# Altium PCB Stm32_Minimum_Board_V1.0.PcbDoc
Units mm, origin at the board's own origin, x right, y up, seen from the top; angles counter-clockwise.
Board outline 53.34 x 22.86 mm, 2 copper layers (Top Layer, Bottom Layer); 31 components, 51 nets, 163 pads, 1 vias.
Unrouted connection lines stored in the file: 103.
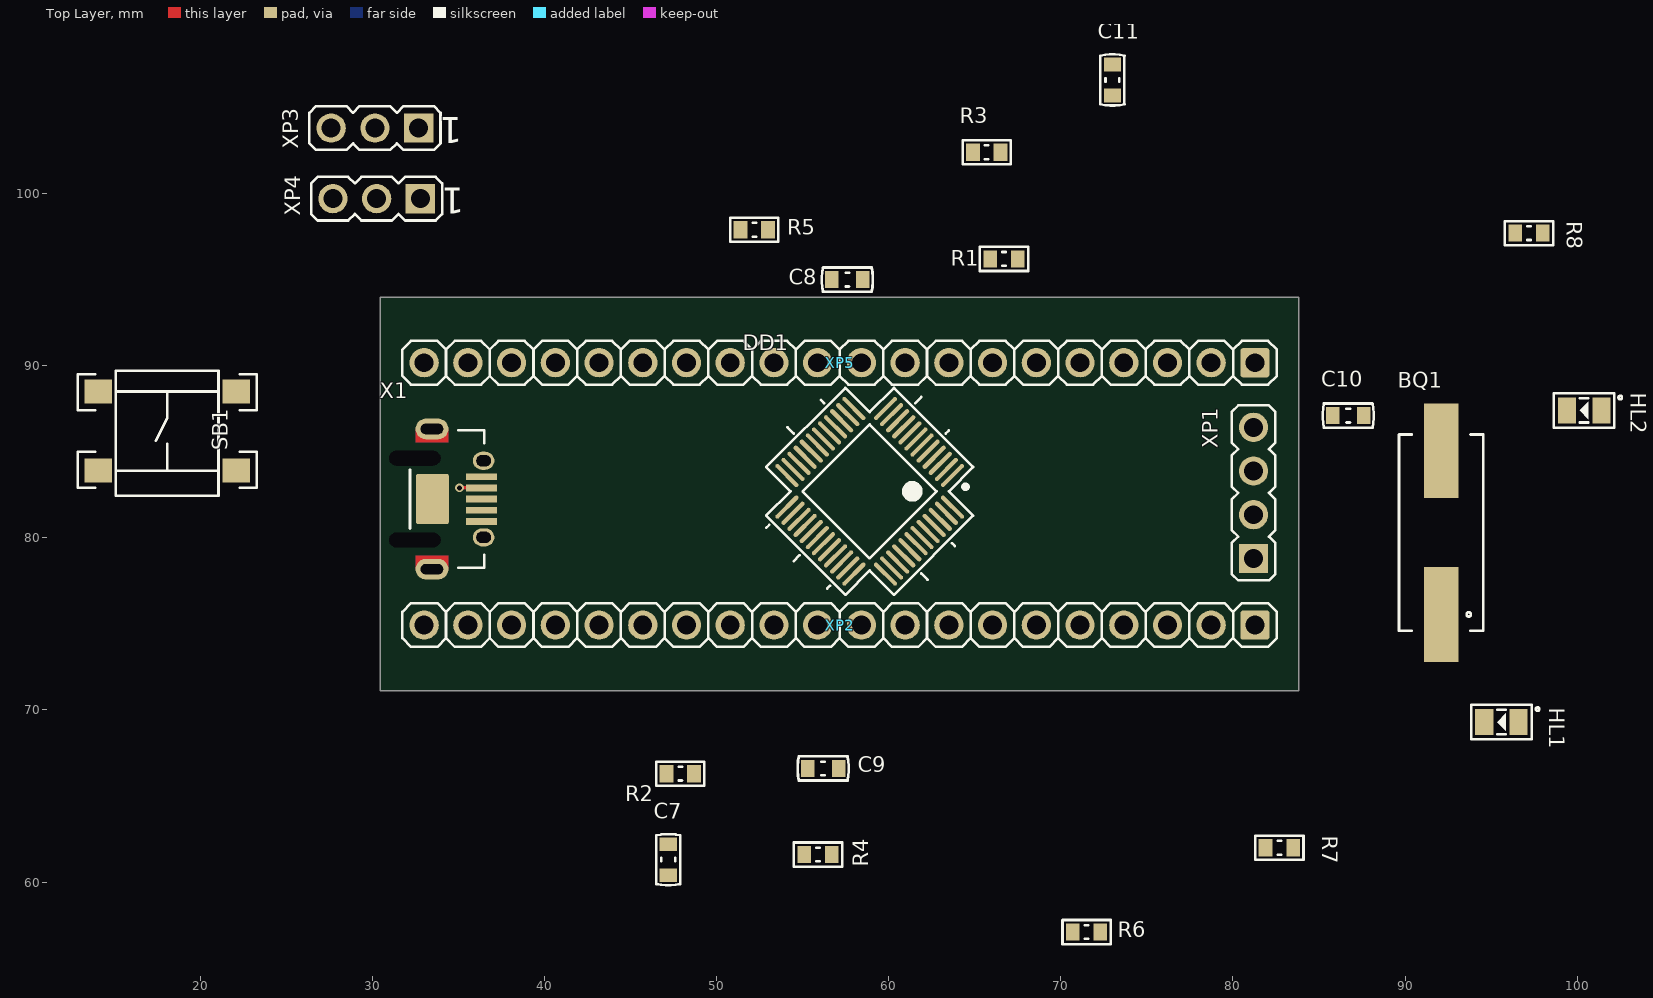
[diagram p0: Top Layer view]
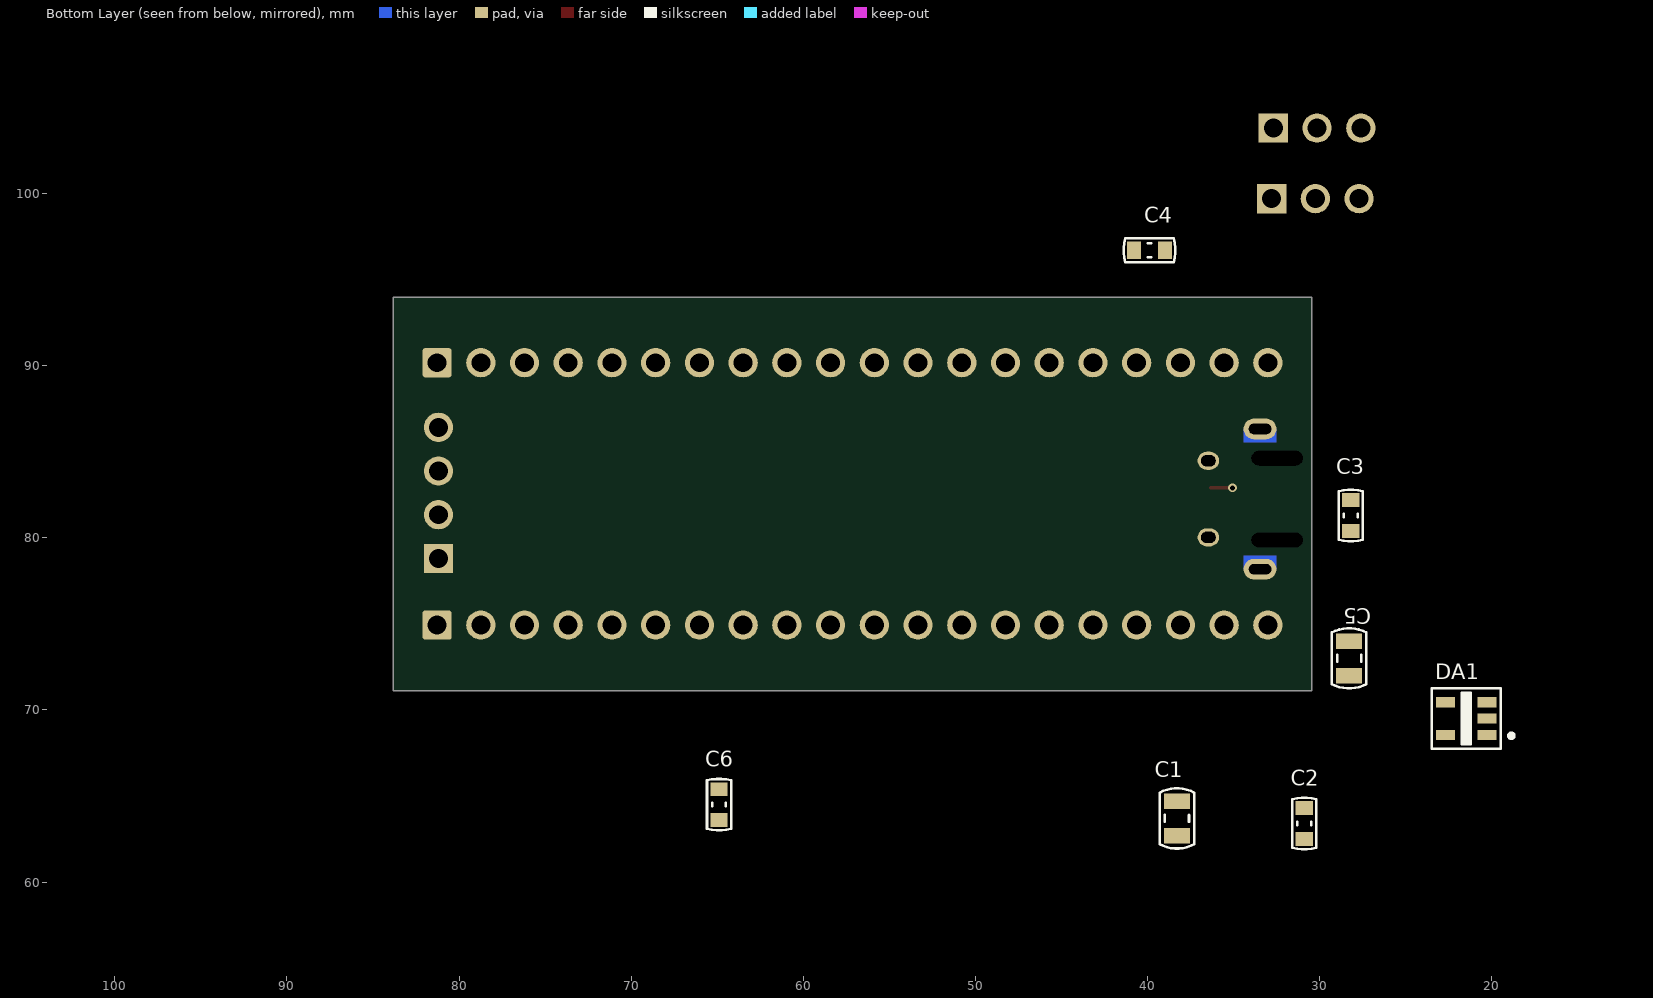
[diagram p1: Bottom Layer view, seen from below]

## Layer stack, top to bottom
Top Solder: solder mask 0.0102, Solder Resist, Dk 3.5
Top Layer: signal copper 0.0356
Dielectric 1: dielectric 0.32, FR-4, Dk 4.8
Bottom Layer: signal copper 0.0356
Bottom Solder: solder mask 0.0102, Solder Resist, Dk 3.5

## Board outline
30.48,71.12 83.82,71.12 83.82,93.98 30.48,93.98

## Design rules (kind name [scope] priority, off if disabled: settings)
BoardOutlineClearance [All] p1: gap=0.4 ignorepadtopadclearanceinfootprint=FALSE
Clearance [All] p1: gap=0.2 ignorepadtopadclearanceinfootprint=FALSE except(0.125: Arc-Track Track-Track; 0.25: Arc-Arc Arc-Via Arc-Hole Track-Via Track-Hole SMDPad-Via SMDPad-Hole THPad-Via THPad-Hole Via-Via Via-Hole Fill-Hole Poly-Hole Region-Hole Text-Hole)
DiffPairsRouting [All] p1: maxlimit=0.2 minlimit=0.125 mostfreqgap=0.2 toplayer_minwidth=0.125 toplayer_maxwidth=0.3 toplayer_prefwidth=0.2 bottomlayer_minwidth=0.125 bottomlayer_maxwidth=0.3 bottomlayer_prefwidth=0.2 maxuncoupledlength=12.7
HoleSize [All] p1: absolutevalues=TRUE maxlimit=3.5 minlimit=0.5 maxpercent=80.000 minpercent=20.000
HoleToHoleClearance [All] p1: gap=0.25 allowstackedmicrovias=TRUE
MinimumAnnularRing [All] p1: minimumring=0.15
MinimumSolderMaskSliver [All] p1: minsoldermaskwidth=0.15
PlaneClearance [All] p1: clearance=0.5
PlaneConnect [All] p1: planeconnectstyle=Direct reliefexpansion=0.508 reliefentries=4 reliefconductorwidth=0.254 reliefairgap=0.254
PolygonConnect [All] p1: connectstyle=Relief reliefconductorwidth=0.25 reliefentries=4 polygonreliefangle="90 Angle" airgapwidth=0.25
RoutingCorners [All] p1: cornerstyle=45-Degree minsetback=2.5 maxsetback=2.5
RoutingVias [All] p1: holewidth=0.3 width=0.5 viastyle="Through Hole" minholewidth=0.3 minwidth=0.5 maxholewidth=1 maxwidth=1.2
SMDEntry [All] p1: side=TRUE corner=TRUE anyangle=FALSE
SMDToCorner [All] p1: distance=78740
SMDToPlane [All] p1: distance=196850
SilkToSilkClearance [All] p1: silktosilkclearance=0.25
SilkToSolderMaskClearance [IsPad] p1: minsilkscreentomaskgap=0.25 clearancetoexposedcopper=TRUE
SolderMaskExpansion [All] p1: expansion=0.05 soldermaskfromhole=TRUE
Width [All] p1: maxlimit=1 minlimit=0.125 preferedwidth=0.2
21 further rules are at their usual default settings.

## Classes and differential pairs
component class Stm32_Minimum_Board_V1.0: BQ1 C1 C2 C3 C4 C5 C6 C7 C8 C9 C11 DA1 DD1 HL1 HL2 R1 R2 R3 R4 R5 R6 R7 SB1 X1 XP1 XP2 XP3 XP4 XP5

## Components (designator, comment, footprint, x,y, rotation, side; value= is the part's Value field where it differs from the comment)
BQ1 "HC-49SMD" HC49-SMD 92.1,80.3 r90 top
C1 "CC0805-X7R-10 мкФ-20%-25В" CC0805 38.3,63.7 r90 bottom value="10 мкФ"
C2 "CC0603-X5R-0.1 мкФ-20%-10В" CC0603 30.9,63.4 r90 bottom value="0.1 мкФ"
C3 "CC0603-X5R-0.1 мкФ-20%-10В" CC0603 28.2,81.3 r90 bottom value="0.1 мкФ"
C4 "CC0603-X5R-0.1 мкФ-20%-10В" CC0603 39.9,96.7 r0 bottom value="0.1 мкФ"
C5 "CC0805-X7R-10 мкФ-20%-25В" CC0805 28.3,73 r90 bottom value="10 мкФ"
C6 "CC0603-X5R-0.1 мкФ-20%-10В" CC0603 64.9,64.5 r90 bottom value="0.1 мкФ"
C7 "CC0603-X5R-0.1 мкФ-20%-10В" CC0603 47.2,61.3 r90 top value="0.1 мкФ"
C8 "CC0603-X5R-0.1 мкФ-20%-10В" CC0603 57.6,95 r0 top value="0.1 мкФ"
C9 "CC0603-X5R-0.1 мкФ-20%-10В" CC0603 56.2,66.6 r180 top value="0.1 мкФ"
C10 "CC0603-X7R-22 пФ-20%-25В" CC0603 86.7,87.1 r0 top value="22 пФ"
C11 "CC0603-X7R-22 пФ-20%-25В" CC0603 73,106.6 r90 top value="22 пФ"
DA1 "TPS76133DBV" TSOP-5 21.5,69.5 r0 bottom
DD1 "STM32F103C8T7" LQFP50P700x700-48 58.9,82.7 r225 top
HL1 "KP-2012EC" KP-2012-RED 95.6,69.3 r180 top
HL2 "KP-2012MBC" KP-2012-BL 100.4,87.4 r180 top
R1 "CR0603-10 кОм-±5%" CR0603 66.7,96.2 r0 top value="10 кОм"
R2 "CR0603-22 Ом-±5%" CR0603 47.9,66.3 r0 top value="22 Ом"
R3 "CR0603-22 Ом-±5%" CR0603 65.7,102.4 r0 top value="22 Ом"
R4 "CR0603-10 кОм-±5%" CR0603 55.9,61.6 r180 top value="10 кОм"
R5 "CR0603-100 кОм-±5%" CR0603 52.2,97.9 r180 top value="100 кОм"
R6 "CR0603-100 кОм-±5%" CR0603 71.5,57.1 r0 top value="100 кОм"
R7 "CR0603-510 Ом-±5%" CR0603 82.7,62 r0 top value="510 Ом"
R8 "CR0603-510 Ом-±5%" CR0603 97.2,97.7 r0 top value="510 Ом"
SB1 "B3FS-1000P" B3FS-10xx 18.1,86.2 r180 top
X1 "microUSB-AB (475900001 Molex)" "microUSB-AB PCB (475900001 Molex)" 33.5,82.25 r90 top
XP1 "PLS-4" PLS-4 81.2,78.8 r90 top
XP2 "PLS-20" PLS-20 81.28,74.93 r180 top
XP3 "PLS-3" PLS-3 32.7,103.8 r180 top
XP4 "PLS-3" PLS-3 32.8,99.7 r180 top
XP5 "PLS-20" PLS-20 81.28,90.17 r180 top

## Footprints (in the part's own frame and the unit in brackets; to place one, negate y for a bottom-side part, rotate by r counter-clockwise, add the part's x,y. Pads: shape width x height; smd on the part's side, far side on the other; paste and mask are expansions set on the pad)
B3FS-10xx [mm]
  rect 1.6x1.4 smd: 1(4,-2.3) 2(-4,-2.3) 3(4,2.3) 4(-4,2.3)
  silkscreen extent -5.2,-3.5 5.2,3.75, body extent -6.3,-3.15 4,4.4, height 3.1
CC0603 [mm]
  rect 0.8x1 smd: 1(-0.9,0) 2(0.9,0)
  silkscreen extent -1.49,-0.7 1.49,0.7, body extent -0.81,-0.42 0.81,0.43, height 0.46
CC0805 [mm]
  rect 0.9x1.5 smd: 1(-1,0) 2(1,0)
  silkscreen extent -1.75,-1 1.75,1, body extent -1,-0.62 1,0.63, height 1.3
CR0603 [mm]
  rect 0.8x1 smd: 1(-0.8,0) 2(0.8,0)
  silkscreen extent -1.4,-0.7 1.4,0.7, body extent -0.81,-0.42 0.81,0.43, height 0.46
HC49-SMD [mm] "Quartz Crystal, SM; Body 13.4 (inc. leads) x 4.9 mm (LxW max)"
  rect 5.5x2 smd: 1(-4.75,0) 2(4.75,0)
  silkscreen extent -5.7,-2.45 5.7,2.45, body extent -7.5,-2.25 7.5,2.25, height 5.1
KP-2012-BL [mm] "Голубой светодиод 0805"
  rect 1.05x1.5 smd: 1(-1,0) 2(1,0)
  silkscreen extent -2.2,-1 1.75,1, body extent -1,-0.62 1,0.63, height 1.1
KP-2012-RED [mm] "Светодиод красный 0805"
  rect 1.05x1.5 smd: 1(-1,0) 2(1,0)
  silkscreen extent -2.2,-1 1.75,1, body extent -1,-0.62 1,0.63, height 1.1
LQFP50P700x700-48 [mm] "Thin QFP, 48-Leads, Body 7x7mm, Pitch 0.5mm, IPC Medium Density"
  oval 1.8x0.25 smd mask+0.05: 1(-4.05,2.75) 2(-4.05,2.25) 3(-4.05,1.75) 4(-4.05,1.25) 5(-4.05,0.75) 6(-4.05,0.25) 7(-4.05,-0.25) 8(-4.05,-0.75) 9(-4.05,-1.25) 10(-4.05,-1.75) 11(-4.05,-2.25) 12(-4.05,-2.75) 25(4.05,-2.75) 26(4.05,-2.25) 27(4.05,-1.75) 28(4.05,-1.25) 29(4.05,-0.75) 30(4.05,-0.25) 31(4.05,0.25) 32(4.05,0.75) 33(4.05,1.25) 34(4.05,1.75) 35(4.05,2.25) 36(4.05,2.75)
  oval 0.25x1.8 smd mask+0.05: 13(-2.75,-4.05) 14(-2.25,-4.05) 15(-1.75,-4.05) 16(-1.25,-4.05) 17(-0.75,-4.05) 18(-0.25,-4.05) 19(0.25,-4.05) 20(0.75,-4.05) 21(1.25,-4.05) 22(1.75,-4.05) 23(2.25,-4.05) 24(2.75,-4.05) 37(2.75,4.05) 38(2.25,4.05) 39(1.75,4.05) 40(1.25,4.05) 41(0.75,4.05) 42(0.25,4.05) 43(-0.25,4.05) 44(-0.75,4.05) 45(-1.25,4.05) 46(-1.75,4.05) 47(-2.25,4.05) 48(-2.75,4.05)
  silkscreen extent -6,-6 6,6, body extent -4.5,-4.5 4.5,4.5, height 1.2
"microUSB-AB PCB (475900001 Molex)" [mm]
  round 0 hole 0.85 slot 3 at 90 deg unplated: 0(-2.375,1.025) 0(2.375,1.025)
  rect 0.4x1.8 smd paste+0 mask+0: 1(-1.3,-2.85) 2(-0.65,-2.85) 3(0,-2.85) 4(0.65,-2.85) 5(1.3,-2.85)
  oval 1.2x1.9 hole 0.6 slot 1.3 at 90 deg: MH(-4.075,0.025) MH(4.075,0.025)
  oval 1.05x1.25 hole 0.65 slot 0.85 at 90 deg: MH(-2.225,-2.975) MH(2.225,-2.975)
  rrect10% 2.9x1.9 smd: MH(0,0)
  Multi-Layer region: -4.075,0.975 -3.3,0.975 -3.3,-0.925 -4.075,-0.925
  Multi-Layer region: 4.075,0.975 3.3,0.975 3.3,-0.925 4.075,-0.925
  silkscreen extent -4,-3 4,1.3, body extent -4.32,-3.11 4.32,2.79, height 2.71
PLS-3 [mm]
  rect 1.7x1.7 hole 1.1: 1(0,0)
  round 1.7 hole 1.1: 2(2.54,0) 3(5.08,0)
  silkscreen extent -1.27,-1.27 6.35,1.27
PLS-4 [mm]
  rect 1.7x1.7 hole 1.1: 1(0,0)
  round 1.7 hole 1.1: 2(2.54,0) 3(5.08,0) 4(7.62,0)
  silkscreen extent -1.27,-1.27 8.89,1.27, body extent -1.27,-1.27 8.89,1.27, height 8.8
PLS-20 [mm] "Штыри однорядные"
  rrect20% 1.7x1.7 hole 1.1: 1(0,0)
  round 1.7 hole 1.1: 2(2.54,0) 3(5.08,0) 4(7.62,0) 5(10.16,0) 6(12.7,0) 7(15.24,0) 8(17.78,0) 9(20.32,0) 10(22.86,0) 11(25.4,0) 12(27.94,0) 13(30.48,0) 14(33.02,0) 15(35.56,0) 16(38.1,0) 17(40.64,0) 18(43.18,0) 19(45.72,0) 20(48.26,0)
  silkscreen extent -1.27,-1.27 49.53,1.27, body extent -1.27,-1.27 49.53,1.27, height 8.54
TSOP-5 [mm] "(SOT23-5)"
  rect 1.1x0.6 smd: 1(-1.2,0.95) 2(-1.2,0) 3(-1.2,-0.95) 4(1.2,-0.95) 5(1.2,0.95)
  silkscreen extent -2.75,-1.75 2,1.75, body extent -1.3,-1.5 1.3,1.5, height 1.12

## Part data
BQ1: "Кварцевый резонатор"
C1 C5: library part CC0805-X7R-#-20%-25В, "Чип конденсатор керамический", Supplier Part Number 1=1458904, Supplier 1=Farnell, Компэл=CC0805KKX7R8BB225
C2 C3 C4 C6 C7 C8 C9: library part CC0603-X5R-#-20%-10В, "Чип конденсатор керамический", Supplier Part Number 1=311-1455-2-ND, Supplier 1=Digi-Key, Компэл=CC0603KRX5R6BB475
C10 C11: library part CC0603-X7R-#-20%-25В, "Чип конденсатор керамический", Supplier Part Number 1=490-5307-6-ND, Supplier 1=Digi-Key, Компэл="GRM188R71E105KA12D MUR"
DA1: "Стабилизатор 3,3В Vin = 16В, Io =  100 мА, Vdo = 170 мВ", Supplier Part Number 1=296-2695-2-ND, Supplier 1=Digi-Key
DD1: "Микроконтроллер 32bit", Supplier Part Number 1=497-11517-ND, Supplier 1=Digi-Key
HL1: "Светодиод красный SMD0805", Supplier Part Number 1=8529949, Supplier 1=Farnell
HL2: "Светодиод голубой SMD0805", Supplier Part Number 1=8529876, Supplier 1=Farnell
R1 R2 R3 R4 R5 R6 R7 R8: library part CR0603-#-±5%, "Чип резистор"
SB1: "Кнопка тактовая 3.1мм", Supplier 1=Mouser, Supplier 2=Farnell
X1: "microUSB SMD"
XP1 XP3 XP4: "Штыри на плату однорядные"
XP2 XP5: "Штыри на плату"

## Via types
v1: diameter 0.5, hole 0.3, Top Layer to Bottom Layer, 1 vias

## Nets (pads, with @x,y where several pads share a name; then routed paths per layer and width w, separated by ;. In a path a pad name is that pad's centre, name@x,y a point inside that pad or via, vN(x,y) a via of type N, cw(c..) or ccw(c..) an arc to the next point about the centre after c; other vN are vias at no path point)
+3V3: C8.1 C9.1 DD1.9 DD1.24 DD1.36 DD1.48 HL1.1 HL2.1 R1.2 R4.1 XP1.1 XP2.1 XP3.3 XP4.3 XP5.18
+5V: C1.1 C2.1 C3.1 DA1.1 DA1.3 X1.1 XP2.3
A0: DD1.10 XP5.5
A1: DD1.11 XP5.6
A2: DD1.12 XP5.7
A3: DD1.13 XP5.8
A4: DD1.14 XP5.9
A5: DD1.15 XP5.10
A6: DD1.16 XP5.11
A7: DD1.17 XP5.12
A8: DD1.29 XP2.16
A9: DD1.30 XP2.15
A10: DD1.31 XP2.14
A11: DD1.32 R2.2 XP2.13
A12: DD1.33 R1.1 R3.2 XP2.12
A15: DD1.38 XP2.11
B0: DD1.18 XP5.13
B1: DD1.19 XP5.14
B3: DD1.39 XP2.10
B4: DD1.40 XP2.9
B5: DD1.41 XP2.8
B6: DD1.42 XP2.7
B7: DD1.43 XP2.6
B8: DD1.45 XP2.5
B9: DD1.46 XP2.4
B10: DD1.21 XP5.15
B11: DD1.22 XP5.16
B12: DD1.25 XP2.20
B13: DD1.26 XP2.19
B14: DD1.27 XP2.18
B15: DD1.28 XP2.17
BOOT0: R6.2 XP3.2
BOOT1: R5.2 XP4.2
C13: DD1.2 R8.2 XP5.2
C14: DD1.3 XP5.3
C15: DD1.4 XP5.4
DM: R2.1 X1.2
DP: R3.1 X1.3
GND: C1.2 C2.2 C3.2 C4.2 C5.2 C6.2 C7.2 C8.2 C9.2 C10.2 C11.2 DA1.2 DD1.8 DD1.23 DD1.35 DD1.47 R7.2 SB1.1 X1.5 X1.MH XP1.4 XP2.2 XP3.1 XP4.1 XP5.19 XP5.20
NetBQ1_1: BQ1.1 C10.1 DD1.5
NetBQ1_2: BQ1.2 C11.1 DD1.6
NetC4_1: C4.1 DA1.4
NetC5_1: C5.1 C6.1 DA1.5
NetDD1_20: DD1.20 R5.1
NetDD1_44: DD1.44 R6.1
NetHL1_2: HL1.2 R7.1
NetHL2_2: HL2.2 R8.1
NRST: C7.1 DD1.7 R4.2 SB1.3 XP5.17
SWCLK: DD1.37 XP1.3
SWDIO: DD1.34 XP1.2
VBAT: DD1.1 XP5.1
pads on no net: SB1.2 SB1.4 X1.0 X1.4
copper on no net: | length 1.3
  Top Layer w0.2: v1(35.073,82.9) 36.35,82.9

## Silkscreen, mask and mechanical layers (free items; w line width, h text height)
Mechanical 1:
  the board outline again, w0.254

## Text inside footprints (layer, text, board x,y; h text height)
XP3: Top Overlay "1" at 35.24,104.435 h1.5 r180
XP4: Top Overlay "1" at 35.34,100.335 h1.5 r180